# EAGLE board Shruti-Main-v01 (EAGLE 5.06)
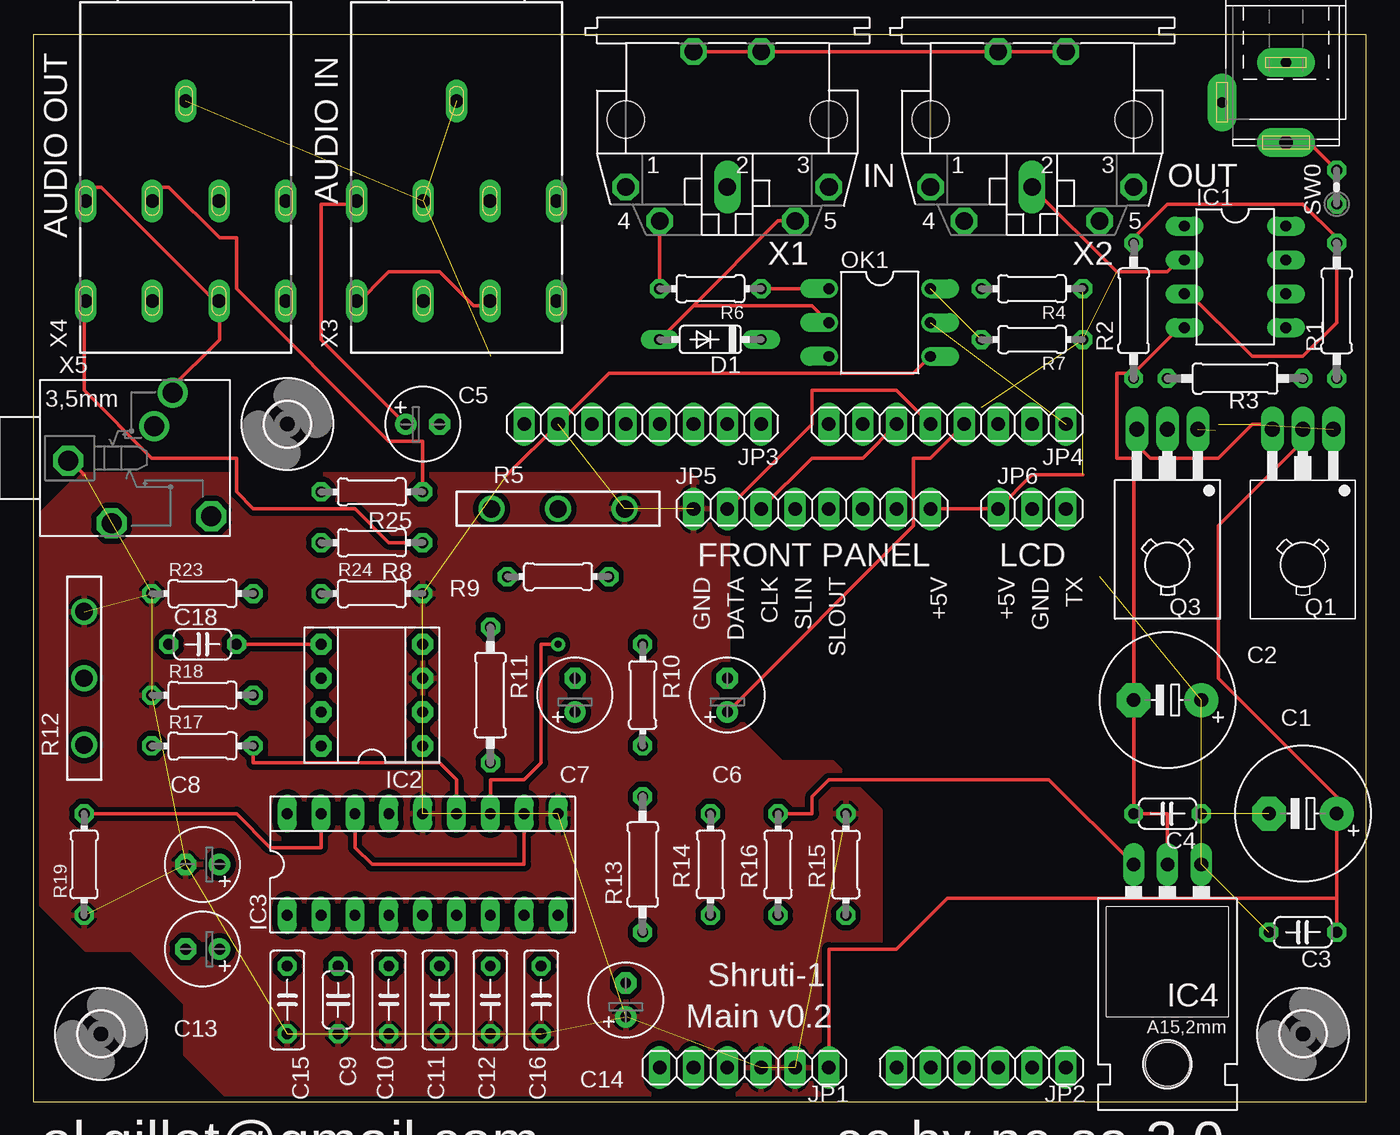
[diagram p0: board, top side]
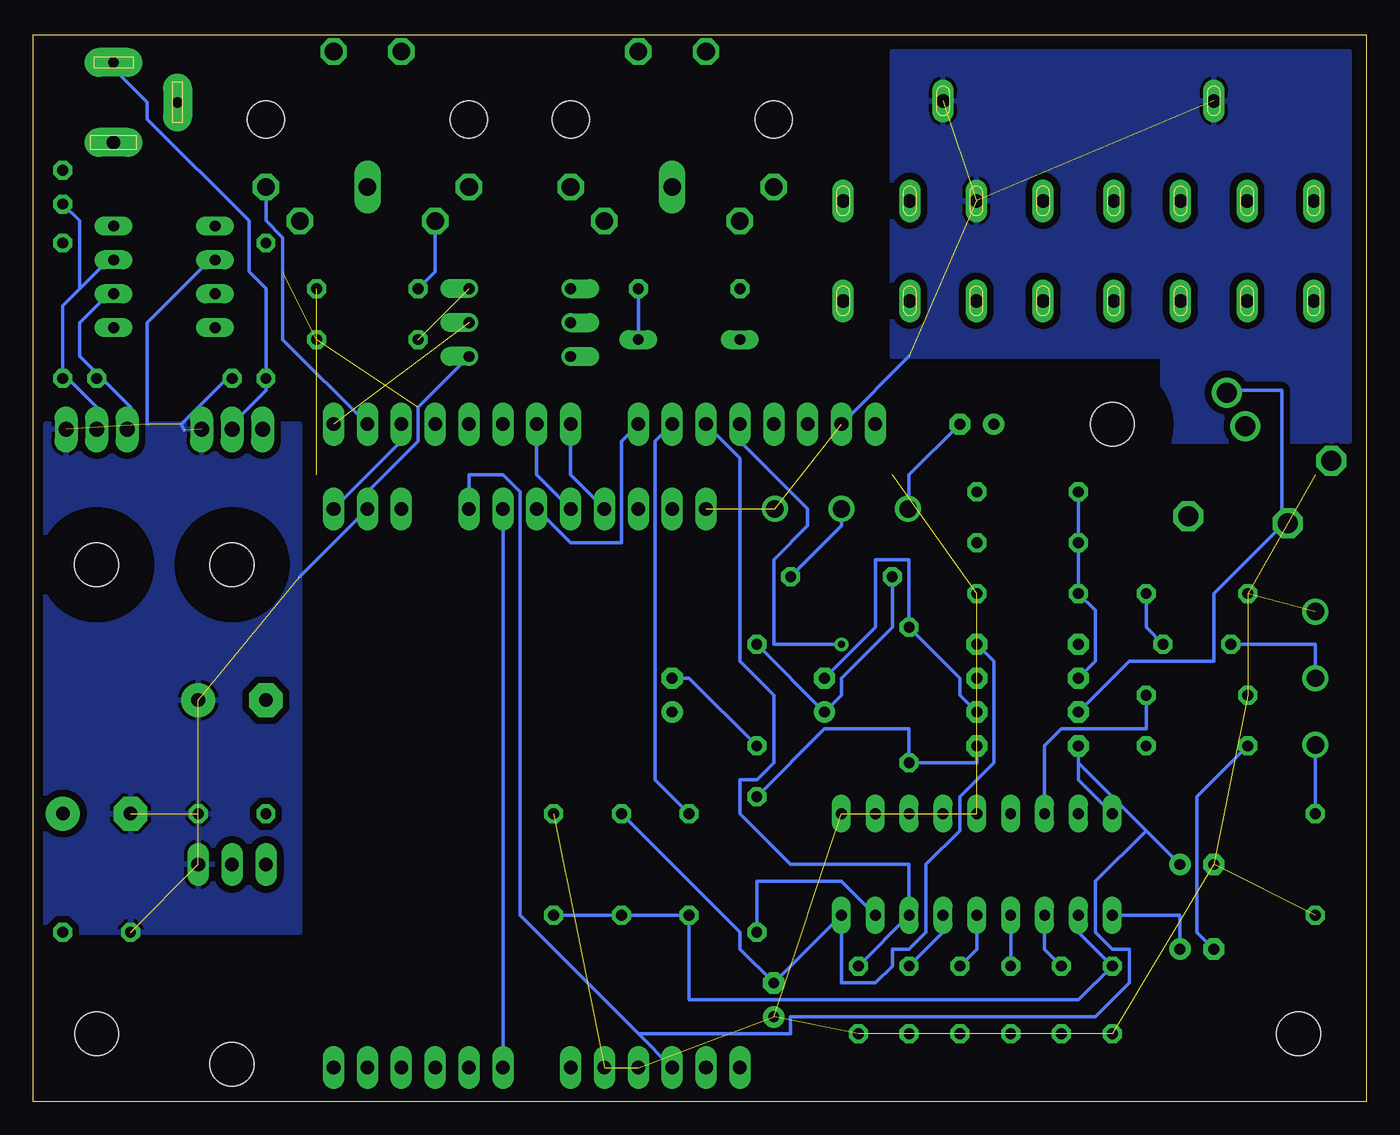
[diagram p1: board, bottom side, seen from below]

Size 100 x 80 mm. Coordinates in mm from the lower left corner, seen from the top.
Outline: 100,0 100,80 0,80 0,0 100,0
Copper layers (1*16): Top 0.035mm / dielectric 1.5mm / Bottom 0.035mm
Design rules "SparkFun_10mil": minimum track width 10mil, minimum drill 20mil, track to track 10mil, track to pad 10mil, pad to pad 10mil, via to via 10mil, smd to smd 10mil, copper to edge 10mil, drill to drill 10mil, minimum pad ring 12mil, minimum via ring 10mil, stop-mask expansion 4mil, vias tented up to drill 25mil, thermal gap 10mil

## Footprints (pad centres in the part's own frame; a part is rotated, then mirrored left to right if it is on the bottom)
E5-10,5 = drill 1.016 pad 2.54 round: + -2.54,0 | drill 1.016 pad 2.54 octagon: - 2.54,0
C050-024X044 = drill 0.813 octagon: 1 -2.54,0; 2 2.54,0
E2,5-6 = drill 0.813 pad 1.6 round: + -1.27,0 | drill 0.813 pad 1.6 octagon: - 1.27,0
C050-025X075 = drill 0.813 octagon: 1 -2.54,0; 2 2.54,0
DO35-7 = drill 0.813 long: A 3.81,0; C -3.81,0
DIL08 = drill 0.813 long: 1 -3.81,-3.81; 2 -1.27,-3.81; 3 1.27,-3.81; 4 3.81,-3.81; 5 3.81,3.81; 6 1.27,3.81; 7 -1.27,3.81; 8 -3.81,3.81
DIL08' = drill 0.813 pad 1.6 octagon: 1 -3.81,-3.81; 2 -1.27,-3.81; 3 1.27,-3.81; 4 3.81,-3.81; 5 3.81,3.81; 6 1.27,3.81; 7 -1.27,3.81; 8 -3.81,3.81
SOCKET18 = drill 0.813 long: 1 -10.16,-3.81; 2 -7.62,-3.81; 3 -5.08,-3.81; 4 -2.54,-3.81; 5 0,-3.81; 6 2.54,-3.81; 7 5.08,-3.81; 8 7.62,-3.81; 9 10.16,-3.81; 10 10.16,3.81; 11 7.62,3.81; 12 5.08,3.81; 13 2.54,3.81; 14 0,3.81; 15 -2.54,3.81; 16 -5.08,3.81; 17 -7.62,3.81; 18 -10.16,3.81
79XXL = drill 1.016 long: GND -2.54,-3.81; IN 0,-3.81; OUT 2.54,-3.81 | hole 3.302: 0,11.176
SPC4078 = drill 0.8 pad 2.184 long: 1 -3,0; 2 0,-4.8 | drill 1 pad 2.184 long: 3 3,0
1X06 = drill 1.016 long: 1 -6.35,0; 2 -3.81,0; 3 -1.27,0; 4 1.27,0; 5 3.81,0; 6 6.35,0
1X08 = drill 1.016 long: 1 -8.89,0; 2 -6.35,0; 3 -3.81,0; 4 -1.27,0; 5 1.27,0; 6 3.81,0; 7 6.35,0; 8 8.89,0
1X03 = drill 1.016 long: 1 -2.54,0; 2 0,0; 3 2.54,0
DIL06 = drill 0.813 offset: 1 -2.54,-3.81; 2 0,-3.81; 3 2.54,-3.81; 4 2.54,3.81; 5 0,3.81; 6 -2.54,3.81
TO126 = drill 1.118 long: 1 -2.286,-5.08; 2 0,-5.08; 3 2.286,-5.08 | hole 3.302: 0,5.08
0207/10 = drill 0.813 octagon: 1 -5.08,0; 2 5.08,0
0204/7 = drill 0.813 octagon: 1 -3.81,0; 2 3.81,0
CABLE_POT_6MM = drill 1.3 pad 1.93 round: A -5,0; E 5,0; S 0,0
0204V = drill 0.813 octagon: 1 -1.27,0; 2 1.27,0
3,3 = hole 3.3: 0,0
MAB5SH = drill 1.321 octagon: 1 7.62,5.08; 3 -7.62,5.08; 4 5.08,7.62; 5 -5.08,7.62; PE -2.54,-5.08; PE@ 2.54,-5.08 | drill 1.321 long: 2 0,5.08 | hole 2.794: 7.62,0; -7.62,0
KLBRSS3 = drill 1 pad 1.6 long: 1 0,-7.5; 2 2.5,-22.5; 3 -2.5,-22.5; 4 2.5,-15; 5 7.5,-15; 6 7.5,-22.5; 7 -2.5,-15; 8 -7.5,-15; 9 -7.5,-22.5
PG203J = drill 1.499 octagon: 1 -5.004,-0.203; 4 5.74,-4.369; 5 -1.753,-4.902 | drill 1.499 round: 2 2.845,4.902; 3 1.448,2.388

## Placement (x,y rotation side)
C1  470u  [E5-10,5]  95.25,21.59 180 top
C2  470u  [E5-10,5]  85.09,30.1 180 top
C3  100n  [C050-024X044]  95.25,12.7 180 top
C4  100n  [C050-024X044]  85.09,21.59 180 top
C5  3.3u  [E2,5-6]  29.21,50.8 0 top
C6  3.3u  [E2,5-6]  52.07,30.48 90 top
C7  3.3u  [E2,5-6]  40.64,30.48 90 top
C8  3.3u  [E2,5-6]  12.7,17.78 180 top
C9  470p  [C050-024X044]  22.86,7.62 90 top
C10  33n  [C050-025X075]  26.67,7.62 90 top
C11  33n  [C050-025X075]  30.48,7.62 90 top
C12  33n  [C050-025X075]  34.29,7.62 90 top
C13  3.3u  [E2,5-6]  12.7,11.43 180 top
C14  3.3u  [E2,5-6]  44.45,7.62 90 top
C15  22n  [C050-025X075]  19.05,7.62 270 top
C16  22n  [C050-025X075]  38.1,7.62 270 top
C18  0.1u  [C050-024X044]  12.7,34.29 0 top
D1  1N4148  [DO35-7]  50.8,57.15 180 top
IC1  UA741P  [DIL08]  90.17,61.85 270 top
IC2  OPA2132P  [DIL08']  25.4,30.48 90 top
IC3  CEM3379SOCKET  [SOCKET18]  29.21,17.78 0 top
IC4  [79XXL]  85.09,13.97 180 top
J1  [SPC4078]  93.98,74.93 270 top
JP1  [1X06]  53.34,2.54 0 top
JP2  [1X06]  71.12,2.54 0 top
JP3  [1X08]  45.72,50.8 180 top
JP4  [1X08]  68.58,50.8 180 top
JP5  [1X08]  58.42,44.45 0 top
JP6  [1X03]  74.93,44.45 180 top
OK1  4N28M  [DIL06]  63.5,58.42 270 top
Q1  BD235  [TO126]  95.25,45.34 180 top
Q3  BD236  [TO126]  85.09,45.34 180 top
R1  2.2k  [0207/10]  97.79,59.31 270 top
R2  1.6k  [0207/10]  82.55,59.31 90 top
R3  68  [0207/10]  90.17,54.23 0 top
R4  220  [0204/7]  74.93,60.96 180 top
R5  10k  [CABLE_POT_6MM]  39.37,44.45 180 top
R6  220  [0204/7]  50.8,60.96 180 top
R7  100k  [0204/7]  74.93,57.15 180 top
R8  22k  [0204/7]  25.4,41.91 180 top
R9  2.2k  [0204/7]  39.37,39.37 0 top
R10  100k  [0204/7]  45.72,30.48 270 top
R11  47k  [0207/10]  34.29,30.48 270 top
R12  10k  [CABLE_POT_6MM]  3.81,31.75 270 top
R13  68k  [0207/10]  45.72,17.78 90 top
R14  20k  [0204/7]  50.8,17.78 90 top
R15  1k  [0204/7]  60.96,17.78 270 top
R16  33k  [0204/7]  55.88,17.78 90 top
R17  10k  [0204/7]  12.7,26.67 0 top
R18  220  [0204/7]  12.7,30.48 0 top
R19  10k  [0204/7]  3.81,17.78 90 top
R23  100k  [0204/7]  12.7,38.1 0 top
R24  10k  [0204/7]  25.4,38.1 0 top
R25  68k  [0204/7]  25.4,45.72 180 top
SW0  0  [0204V]  97.79,68.58 90 top
U$1  [3,3]  95.25,5.08 0 top
U$3  [3,3]  5.08,5.08 0 top
U$4  [3,3]  19.05,50.8 0 top
X1  MAB5SH  [MAB5SH]  52.07,73.66 180 top
X2  MAB5SH  [MAB5SH]  74.93,73.66 180 top
X3  KLBRSS3  [KLBRSS3]  31.75,82.55 0 top
X4  KLBRSS3  [KLBRSS3]  11.43,82.55 0 top
X5  PG203J  [PG203J]  7.62,48.26 0 top

## Library data of the parts
C1-C16 C18 = rcl
D1 = diode
IC1 = linear
IC2 = burr-brown
IC3 = cem
IC4 = v-reg
J1 = con-jack
JP1-JP6 = pinhead
OK1 = optocoupler
Q1 = transistor-npn
Q3 = transistor-pnp
R1-R4 R6-R11 R13-R19 R23-R25 SW0 = resistor
R5 R12 = pot-cable
U$1 U$3 U$4 = holes
X1 X2 X5 = con-hirschmann
X3 X4 = con-lumberg

## Nets
AUDIOIN: IC2.1 R11.2 R13.2
GND: C1.- C2.+ C3.2 C4.1 C8.- C9.1 C10.1 C11.1 C12.1 C14.+ C15.2 C16.2 IC1.2 IC2.3 IC3.10 IC3.14 IC4.GND JP1.4 JP1.5 JP3.7 JP5.1 JP6.2 OK1.4 Q1.1 Q3.1 R3.1 R5.A R7.1 R12.A R15.1 R18.1 R19.1 R23.1 R24.2 X2.2 X3.1 X3.7 X4.1 X5.1
N$1: IC1.6 Q1.3 Q3.3 R3.2
N$2: C1.+ C3.1 IC1.7 JP1.6 Q1.2 R1.2 SW0.1
N$3: IC1.3 R1.1 R2.2
N$4: JP4.5 JP5.2
N$5: IC3.8 R13.1
N$6: R4.2 X2.4
N$7: JP4.6 JP5.3
N$8: JP2.1 JP5.7
N$9: JP4.7 JP5.5
N$10: JP4.8 JP5.4
N$11: JP3.1 JP5.6
N$12: C6.- R10.2
N$13: JP4.2 X2.3
N$14: D1.C OK1.1 R6.1
N$16: D1.A OK1.2 X1.5
N$17: R6.2 X1.4
N$18: JP4.1 OK1.5
N$19: R5.S R9.2
N$20: C6.+ JP4.4
N$21: C7.- IC2.2 R11.1
N$22: JP4.3 JP6.1
N$23: C7.+ R9.1 R10.1
N$24: IC2.7 X4.2 X4.8 X5.2 X5.5
N$25: C18.2 IC2.5 R23.2
N$26: C9.2 IC3.3
N$27: C10.2 IC3.4
N$28: C5.- R5.E
N$29: C11.2 IC3.5
N$30: IC3.17 R12.E R19.2
N$31: C12.2 IC3.6
N$32: JP3.2 R14.2
N$33: C16.1 IC3.7 JP3.3
N$34: IC3.12 JP3.4
N$35: IC3.13 R17.2
N$36: C13.- R17.1
N$37: R25.1 X4.7
N$38: IC3.11 IC3.16 R18.2
N$39: C13.+ IC3.1
N$40: R8.1 X4.9
N$41: C5.+ X3.8
N$42: C2.- C4.2 IC1.4 IC4.IN J1.1 Q3.2 R2.1
N$43: C15.1 IC3.2 R14.1 R15.2 R16.1
N$44: C18.1 R12.S
N$45: IC2.6 R8.2 R24.1 R25.2
N$46: X3.2 X3.9
N$47: J1.3 SW0.2
N$48: OK1.6 R7.2
PE: X1.PE X1.PE@ X2.PE X2.PE@
VCC: C8.+ IC2.8 IC3.18 JP1.3 JP5.8 JP6.3 R4.1
VEE: C14.- IC2.4 IC3.9 IC4.OUT R16.2

## Tracks (layer width: path | path; a pad name or v marks a point on that pad's centre or on a via)
AUDIOIN
  Bottom 0.254: IC2.1 29.21,25.4 R11.2 34.29,27.94 40.64,27.94 R13.2
GND  (35 unrouted)
  Top 0.254: 35.56,46.99 JP3.7 43.18,54.61 66.04,54.61 OK1.4 | X5.1 2.54,48.26 3.81,46.99 3.79,46.99 | X2.2 81.28,62.23 85.09,62.23 86.36,63.5 IC1.2
  Bottom 0.254: JP3.7 34.29,55.88 | OK1.4 71.12,52.07 71.12,49.53 74.93,45.72 JP6.2 80.01,39.37 | R3.1 85.09,54.61 88.9,50.8 88.7,50.34 | IC1.2 86.36,63.5 91.44,58.42 91.44,50.8 91.39,50.8
  pour Bottom (isolate 0.508): 1.27,78.74 1.27,49.53 15.24,49.53 15.24,55.88 35.56,55.88 35.56,78.74
  pour Bottom (isolate 0.508): 80.01,50.8 80.01,12.7 99.06,12.7 99.06,50.8
  pour Top (isolate 0.406): 0,43.4 3.59,46.99 49.23,46.99 52.07,44.15 52.07,29.42 56.09,25.4 59.91,25.4 63.5,21.81 63.5,3.59 59.91,0 15.02,0 11.43,3.59 11.43,7.41 7.41,11.43 4.02,11.43 0,15.45
N$1
  Top 0.254: Q3.3 82.55,49.53 83.82,48.26 88.9,48.26 91.44,50.8 92.71,50.8 Q1.3
  Bottom 0.254: 95.25,54.61 92.71,52.07 92.71,50.8 Q1.3 | 95.25,54.61 96.52,55.88 96.52,58.42 93.98,60.96 IC1.6 | 95.25,54.61 R3.2
N$2
  Top 0.254: 97.79,15.24 C1.+ 97.79,22.86 88.9,31.75 88.9,43.18 95.25,49.53 Q1.2 | 97.79,15.24 C3.1 | JP1.6 59.69,11.43 64.77,11.43 68.58,15.24 97.79,15.24
  Bottom 0.254: 97.79,54.61 95.25,52.07 Q1.2 | 96.52,60.96 97.79,59.69 97.79,54.61 | 96.52,60.96 93.98,63.5 IC1.7 | 97.79,54.61 R1.2 | SW0.1 96.52,66.04 96.52,60.96
N$3
  Top 0.254: IC1.3 86.36,60.96 91.44,55.88 95.25,55.88 97.79,58.42 R1.1 97.79,64.77 95.25,67.31 85.09,67.31 82.55,64.77 R2.2
N$4
  Top 0.254: JP5.2 58.42,50.8 58.42,53.34 64.77,53.34 JP4.5
N$5
  Bottom 0.254: IC3.8 39.37,16.51 45.72,16.51 R13.1
N$6
  Bottom 0.254: R4.2 69.85,62.23 X2.4
N$7
  Top 0.254: JP5.3 58.42,48.26 62.23,48.26 JP4.6
N$8
  Bottom 0.254: JP2.1 JP5.7
N$9
  Bottom 0.254: JP5.5 62.23,46.99 JP4.7
N$10
  Bottom 0.254: JP5.4 59.69,46.99 JP4.8
N$11
  Bottom 0.254: JP5.6 59.69,41.91 55.88,41.91 55.88,49.53 JP3.1
N$12
  Bottom 0.254: R10.2 50.8,31.75 C6.-
N$13
  Bottom 0.254: JP4.2 81.28,57.15 81.28,64.77 82.55,66.04 X2.3
N$14
  Top 0.254: R6.1 OK1.1
  Bottom 0.254: D1.C R6.1
N$16
  Top 0.254: 49.53,59.69 55.88,66.04 X1.5 | D1.A 49.53,59.69 | OK1.2 58.42,59.69 49.53,59.69
N$17
  Top 0.254: R6.2 X1.4
N$18  (1 unrouted)
N$19
  Bottom 0.254: R9.2 39.37,43.18 R5.S
N$20
  Top 0.254: C6.+ 66.04,43.18 66.04,48.26 67.31,48.26 JP4.4
N$21
  Bottom 0.254: IC2.2 30.48,30.48 30.48,31.75 R11.1 34.29,40.64 36.83,40.64 36.83,35.56 C7.-
N$22
  Bottom 0.254: JP6.1 72.39,49.53 JP4.3
N$23
  Bottom 0.254: R9.1 35.56,35.56 39.37,31.75 39.37,30.48 C7.+ R10.1
N$24
  Top 0.254: 13.97,59.69 5.08,68.58 3.81,68.58 X4.8 | 13.97,59.69 13.97,57.15 10.16,53.34 X5.2 | 13.97,59.69 X4.2
  Bottom 0.254: IC2.7 17.78,33.02 11.43,33.02 11.43,38.1 6.35,43.18 X5.5 6.35,44.45 6.35,53.34 10.16,53.34 X5.2
N$25
  Top 0.254: C18.2 IC2.5
  Bottom 0.254: C18.2 16.51,35.56 R23.2
N$26
  Bottom 0.254: C9.2 24.13,11.43 IC3.3
N$27
  Bottom 0.254: C10.2 IC3.4
N$28
  Bottom 0.254: C5.- 34.29,46.99 34.29,44.45 R5.E
N$29
  Bottom 0.254: C11.2 29.21,11.43 IC3.5
N$30
  Top 0.254: IC3.17 21.59,19.05 17.78,19.05 15.24,21.59 R19.2
  Bottom 0.254: R19.2 R12.E
N$31
  Bottom 0.254: C12.2 31.75,12.7 IC3.6
N$32
  Bottom 0.254: R14.2 53.34,24.13 53.34,49.53 JP3.2
N$33
  Bottom 0.254: C16.1 IC3.7 34.29,17.78 43.18,17.78 46.99,21.59 46.99,24.13 45.72,24.13 44.45,25.4 44.45,30.48 46.99,33.02 46.99,48.26 JP3.3
N$34  (via drill 0.51)
  Top 0.254: IC3.12 34.29,24.13 36.83,24.13 38.1,25.4 38.1,34.29 v39.37,34.29
  Bottom 0.254: v39.37,34.29 44.45,34.29 44.45,40.64 41.91,43.18 41.91,44.45 46.99,49.53 JP3.4
N$35
  Top 0.254: R17.2 16.51,25.4 30.48,25.4 31.75,24.13 IC3.13
N$36
  Bottom 0.254: R17.1 12.7,22.86 12.7,12.7 C13.-
N$37
  Top 0.254: R25.1 29.21,49.53 26.67,49.53 15.24,60.96 15.24,64.77 13.97,64.77 10.16,68.58 8.89,68.58 X4.7
N$38
  Top 0.254: IC3.11 36.83,17.78 25.4,17.78 24.13,19.05 IC3.16
  Bottom 0.254: IC3.16 24.13,26.67 22.86,27.94 16.51,27.94 R18.2
N$39
  Bottom 0.254: IC3.1 13.97,13.97 C13.+
N$40
  Top 0.254: R8.1 26.67,41.91 24.13,44.45 16.51,44.45 15.24,45.72 15.24,48.26 8.89,48.26 3.81,53.34 3.81,59.69 X4.9
N$41
  Top 0.254: C5.+ 21.59,57.15 21.59,67.31 24.13,67.31 X3.8
N$42
  Top 0.254: IC4.IN 85.09,21.59 C4.2 C2.- 82.55,48.26 81.28,48.26 81.28,54.61 82.55,54.61 | 82.55,54.61 86.36,58.42 IC1.4 | 82.55,54.61 R2.1
  Bottom 0.254: Q3.2 85.09,50.8 82.55,53.34 R2.1 82.55,54.61 82.55,60.96 83.82,62.23 83.82,66.04 91.44,73.66 91.44,74.93 93.98,77.47 J1.1
N$43
  Bottom 0.254: IC3.2 21.59,12.7 C15.1 21.59,7.62 50.8,7.62 R14.1 R16.1 R15.2
N$44
  Bottom 0.254: C18.1 3.81,34.29 R12.S
N$45
  Bottom 0.254: R25.2 R8.2 R24.1 20.32,36.83 20.32,33.02 IC2.6
N$46
  Top 0.254: X3.9 24.13,59.69 26.67,62.23 30.48,62.23 33.02,59.69 34.29,59.69 X3.2
N$47
  Top 0.254: SW0.2 95.25,72.39 93.98,72.39 J1.3
N$48  (1 unrouted)
PE
  Top 0.254: X1.PE@ X1.PE X2.PE@ X2.PE
VCC  (1 unrouted)
  Top 0.254: JP5.8 JP6.3 74.93,46.99 78.74,46.99
  Bottom 0.254: IC3.18 21.59,24.13 21.59,25.4 | 21.59,25.4 IC2.8 | 16.51,20.32 21.59,25.4 | 16.51,20.32 C8.+ | 54.61,5.08 63.5,13.97 63.5,45.72 64.77,46.99 67.31,46.99 JP5.8 | 54.61,5.08 JP1.3 | 16.51,20.32 20.32,16.51 20.32,12.7 19.05,11.43 17.78,11.43 17.78,8.89 20.32,6.35 43.18,6.35 43.18,5.08 54.61,5.08
VEE
  Top 0.254: IC4.OUT 76.2,24.13 59.69,24.13 58.42,22.86 58.42,21.59 R16.2
  Bottom 0.254: R16.2 46.99,12.7 46.99,11.43 C14.- IC3.9 39.37,8.89 36.83,8.89 35.56,10.16 35.56,11.43 34.29,11.43 33.02,12.7 33.02,17.78 30.48,20.32 30.48,22.86 27.94,25.4 27.94,33.02 IC2.4

## Text on the board
tPlace: IN | OUT | AUDIO IN | AUDIO OUT | FRONT PANEL | LCD | GND | DATA | CLK | SLIN | SLOUT | +5V | +5V | GND | TX | Shruti-1 | Main v0.2
tNames: ol.gillet@gmail.com | cc-by-nc-sa 3.0